# Altium PCB PCB1.PcbDoc (part 2 of 2)
Units mm, origin at the board's own origin, x right, y up, seen from the top; angles counter-clockwise.
Board outline 124.84 x 79.12 mm, 2 copper layers (Top Layer, Bottom Layer); 83 components, 68 nets, 287 pads, 46 vias.
Unrouted connection lines stored in the file: 3.
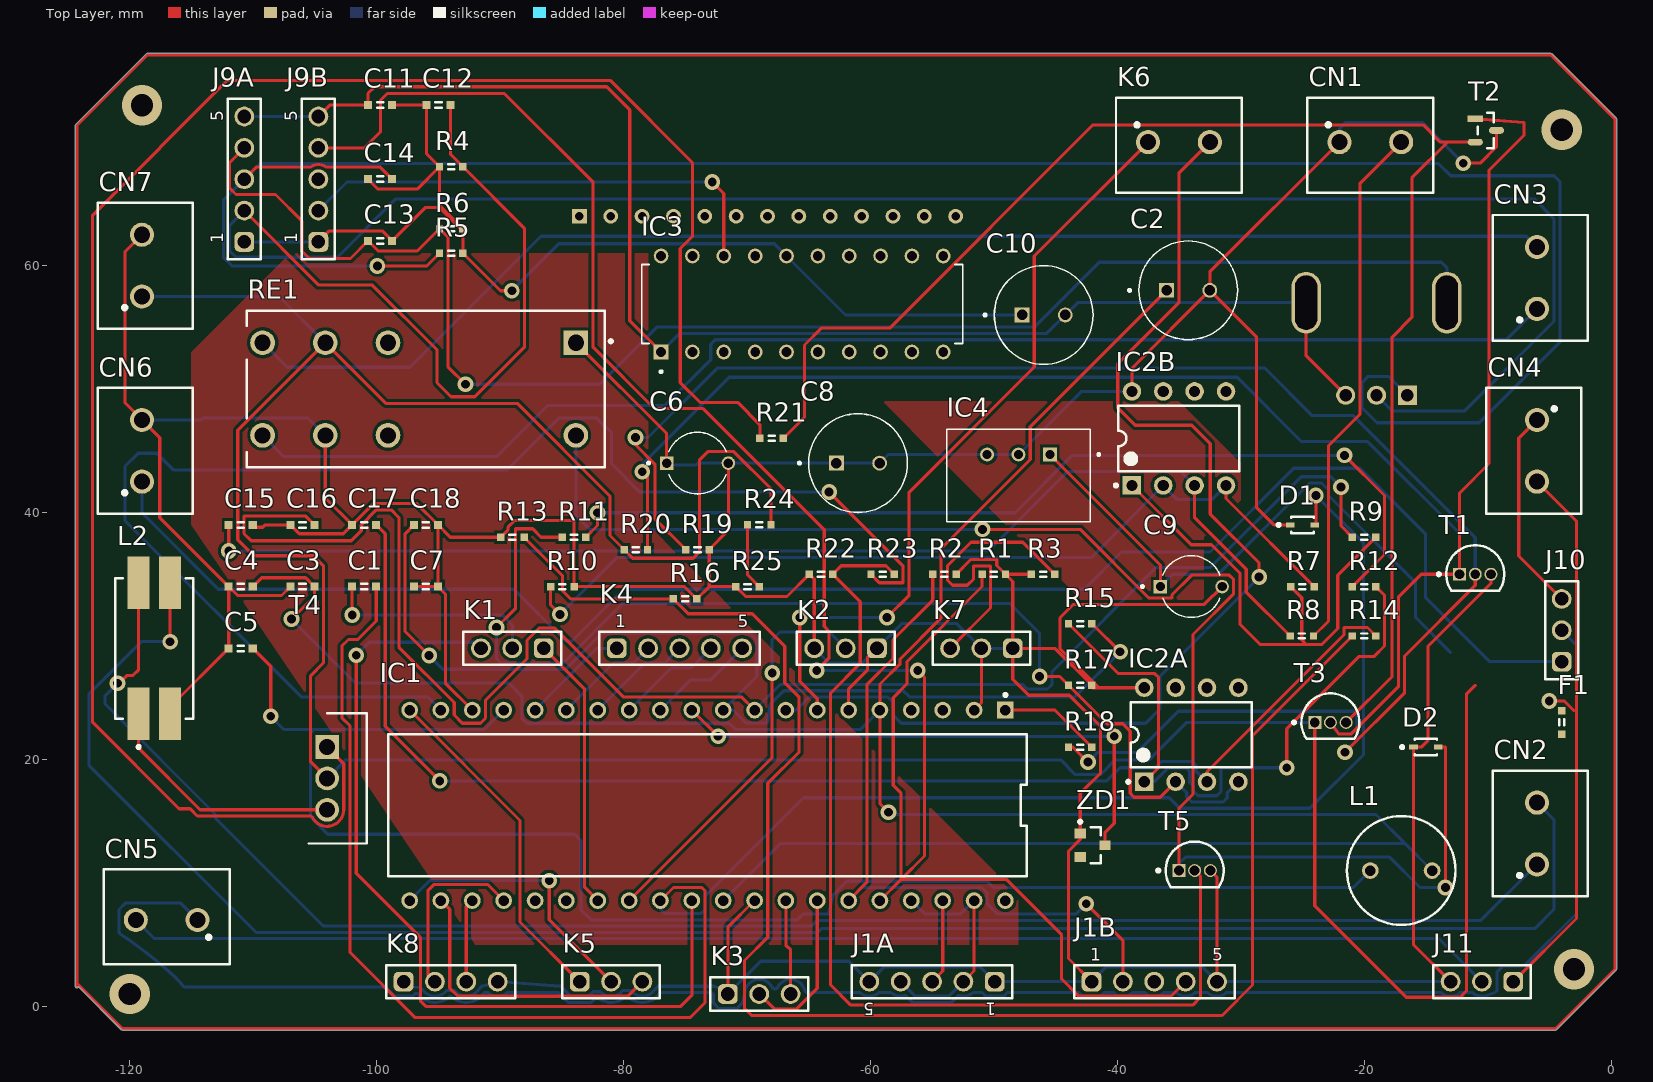
[diagram p0: Top Layer view]

## Via types
v1: diameter 1.27, hole 0.711, Top Layer to Bottom Layer, 42 vias
v2: diameter 3.27, hole 1.811, Top Layer to Bottom Layer, 4 vias

## Nets (pads, with @x,y where several pads share a name; then routed paths per layer and width w, separated by ;. In a path a pad name is that pad's centre, name@x,y a point inside that pad or via, vN(x,y) a via of type N, cw(c..) or ccw(c..) an arc to the next point about the centre after c; other vN are vias at no path point) (continued)
NetC14_1: (continued)
  Bottom Layer w0.254: v1(-99.932,59.969) -111.692,59.969 -112.403,60.68 -112.403,65.307 J9A.3 -109.435,68.275 -13.987,68.275 -12.988,67.275 -4.622,67.275 -4.123,66.776 -4.123,53.822 -10.676,47.269 -18.957,47.269 -20.176,48.488 -20.176,50.52 -19.668,51.028 -18.028,51.028 ENC1.A
NetC15_2: C15.2 IC2B.3 R8.1 | length 98.9
  Top Layer w0.254: v1(-111.975,36.88) C15.2 ; IC2B.3 -33.73,39.579 -29.553,35.402 -29.553,33.553 R8.1
  Bottom Layer w0.254: v1(-111.975,36.88) -50.458,36.88 -44.006,43.332 -34.872,43.332 IC2B.3
NetC16_1: C16.1 IC1.9 R9.1 | length 132.9
  Top Layer w0.254: C16.1 -105.731,39.706 -110.731,39.706 -110.731,38.294 -110.155,37.718 -102.04,37.718 -101.239,38.519 -101.239,38.983 -100.008,40.214 -98.811,40.214 -98.189,39.592 -98.189,29.092 -93.709,24.612 -93.709,23.596 -93.048,22.936 -91.575,22.936 -91.169,23.342 -91.169,24.79 -87.816,28.143 -87.816,29.641 -86.8,30.657 -85.606,30.657 -80.018,25.069 -70.449,25.069 IC1.9 ; v1(-21.878,42.062) -21.878,38.928 R9.1
  Bottom Layer w0.254: IC1.9 -67.308,26.072 -47.654,26.072 -47.286,25.704 -45.652,25.704 -45.271,26.085 -45.271,27.127 -36.838,35.559 -32.448,35.559 -25.108,42.9 -22.716,42.9 v1(-21.878,42.062)
NetC17_1: C17.1 IC2A.3 R14.1 | length 106.6
  Top Layer w0.254: C17.1 -99.297,38.272 -99.297,22.682 v1(-94.877,18.262) ; IC2A.3 -32.73,18.999 -21.631,30.098 -21.631,30.683 -19.733,30.683 R14.1
  Bottom Layer w0.254: v1(-94.877,18.262) -40.845,18.262 -39.778,19.329 -36.926,19.329 -36.425,19.829 -33.928,19.829 -33.631,19.532 -33.631,19.091 IC2A.3
NetC18_2: C18.2 IC1.10 R15.1 | length 86.2
  Top Layer w0.254: C18.2 -97.681,38.294 -97.681,30.362 v1(-95.741,28.422) ; R15.1 v1(-39.768,28.718)
  Bottom Layer w0.254: v1(-95.741,28.422) -94.623,27.304 -84.666,27.304 -81.771,30.2 -69.706,30.2 -69.198,29.692 -69.198,26.722 IC1.10 -71.092,24 -70.036,22.944 -68.351,22.944 -68.106,24.46 -67.001,25.564 -57.327,25.564 -56.832,25.069 -43.417,25.069 v1(-39.768,28.718)
NetCN1_2: CN1.2 R8.2 | length 42.9
  Top Layer w0.254: R8.2 -22.894,31.206 -22.894,45.415 -20.328,47.98 -20.328,66.672 CN1.2
NetCN2_1: CN2.1 L2.4 | length 137
  Top Layer w0.254: v1(-120.984,26.164) -120.837,26.164 -120.192,26.808 -119.72,26.808 -119.27,27.259 L2.4
  Bottom Layer w0.254: v1(-120.984,26.164) -121.984,25.164 -121.984,24.485 -113.043,15.544 -113.043,15.244 -104.296,6.497 -64.768,6.497 -64.306,6.959 -10.541,6.959 CN2.1
NetCN2_2: CN2.2 L2.3 | length 153.1
  Top Layer w0.254: L2.3 -116.73,29.548 v1(-116.721,29.54)
  Bottom Layer w0.254: v1(-116.721,29.54) -119.045,29.54 -123.3,25.285 -123.3,19.532 -109.757,5.989 -64.26,5.989 -63.951,6.299 -6.18,6.299 -4.631,7.848 -4.631,15.131 CN2.2
NetCN3_1: CN3.1 RE1.24 | length 109.6
  Bottom Layer w0.254: RE1.24 -107.506,44.526 -90.28,44.526 -86.14,48.666 -76.64,48.666 -72.932,52.374 -72.932,53.644 -72.576,54 -8.5,54 CN3.1
NetCN3_2: CN3.2 RE1.14 | length 108.8
  Bottom Layer w0.254: RE1.14 -107.245,51.765 -97.29,51.765 -86.673,62.382 -6.882,62.382 CN3.2
NetCN4_1: CN4.1 J10.3 | length 16.6
  Top Layer w0.254: CN4.1 -7.476,46.024 -7.476,36.476 J10.3
NetCN4_2: CN4.2 J11.1 | length 43.9
  Top Layer w0.254: J11.1 -2.802,7.118 -2.802,39.302 CN4.2
NetCN5_1: CN5.1 J10.2 | length 163.6
  Bottom Layer w0.254: CN5.1 -115.856,8.356 -120.353,8.356 -120.861,7.848 -120.861,6.063 -120.861,6.061 ccw(c-120.607,6.063) -120.748,5.852 cw(c-138.611,-21.405) -116.386,2.429 cw(c-120.932,-2.445) -115.675,1.652 -115.664,1.641 -115.59,1.567 -99.281,1.567 -99.207,1.492 -98.533,0.819 -97.086,0.819 -96.88,1.025 -96.67,1.025 -96.586,0.941 ccw(c-95.27,2) -94.165,0.722 cw(c-94,0.53) -93.835,0.722 ccw(c-92.73,2) -91.349,1.028 -91.334,1.042 -91.26,1.117 -90.974,1.117 ccw(c-90.19,2) -89.406,1.117 -85.28,1.117 -84.474,0.311 -82.606,0.311 -82.24,0.677 -82.135,0.677 -82.05,0.677 ccw(c-81,2) -79.895,0.722 cw(c-79.73,0.53) -79.565,0.722 ccw(c-78.46,2) -77.079,1.028 -77.064,1.042 -76.99,1.117 -72.87,1.117 -72.721,0.968 -72.721,0.277 -72.263,-0.181 -70.816,-0.181 -70.359,0.277 -70.156,1.243 cw(c-69,1) -70.14,1.307 -70.104,1.442 -70.037,1.564 cw(c-69,1) -67.954,1.549 ccw(c-67.73,1.668) -67.506,1.549 cw(c-66.46,1) -65.304,1.242 -65.253,1.191 -65.179,1.117 -60.864,1.117 ccw(c-60.08,2) -59.296,1.117 -58.324,1.117 ccw(c-57.54,2) -57.249,0.855 -57.219,0.855 -57.114,0.855 -56.563,0.304 -53.437,0.304 -52.886,0.855 -52.781,0.855 -52.751,0.855 ccw(c-52.46,2) -51.676,1.117 -50.942,1.117 -50.644,0.819 -49.197,0.819 -48.899,1.117 -43.101,1.117 -42.804,0.819 -41.356,0.819 -41.059,1.117 -40.324,1.117 ccw(c-39.54,2) -38.756,1.117 -37.784,1.117 ccw(c-37,2) -36.216,1.117 -35.244,1.117 ccw(c-34.46,2) -33.676,1.117 -32.704,1.117 ccw(c-31.92,2) -31.136,1.117 -13.784,1.117 ccw(c-13,2) -12.216,1.117 -11.244,1.117 ccw(c-10.46,2) -10.073,0.884 -9.403,1.117 -9.254,1.266 -9.254,2.768 -8.746,3.276 -7.044,3.276 -2.802,7.518 -2.802,29.262 J10.2
NetCN5_2: CN5.2 J11.2 | length 111.1
  Bottom Layer w0.254: CN5.2 -117.981,5.481 -13.941,5.481 J11.2
NetCN6_1: CN6.1 J10.1 | length 137.1
  Bottom Layer w0.254: CN6.1 -119,39.972 -112.81,33.781 -88.883,33.781 -84.694,29.593 -84.159,29.593 -79.97,33.781 -42.68,33.781 -39.658,36.804 -32.484,36.804 -25.702,43.586 -20.354,43.586 -15.045,38.277 -15.045,33.135 -9.83,27.92 J10.1
NetCN7_1: CN7.1 F1.1 R20.2 R24.1 RE1.11 T3.1 T4.2 | length 257
  Top Layer w0.254: T4.2 -105.342,19.802 -105.342,26.771 -104.301,27.812 -104.301,35.686 -105.113,36.499 -109.952,36.499 -111.239,37.786 -111.239,46.661 RE1.11 -99.244,48.844 -88.603,48.844 -81.085,41.325 -81.085,38.135 R20.2 -79.246,36.296 -74.354,36.296 -73.846,36.804 -73.846,44.245 -73.16,44.931 -71.052,44.931 -68.05,41.929 R24.1 ; T3.1 -24,8.142 -16.594,0.736 -12.226,0.736 -11.718,1.244 -11.718,25.282 -11,26
  Bottom Layer w0.254: CN7.1 -107.9,57.5 RE1.11 ; T4.2 -102.496,19.964 -44.585,19.964 -43.391,18.77 -41.353,18.77 -40.159,19.964 -37.417,19.964 -34.381,23 T3.1
NetD2_2: D2.2 RE1.A2 T5.1 | length 124.4
  Top Layer w0.254: v1(-50.91,38.633) -42.995,38.633 -37.431,33.069 -35.568,33.069 -35.568,33.331 -33.968,34.931 -30.92,34.931 -30.569,34.58 -30.569,33.421 -33.866,30.124 -33.866,17.186 -35,16.052 T5.1 ; D2.2 -13.419,21 v1(-13.419,9.626)
  Bottom Layer w0.254: RE1.A2 -83.854,46.25 -83.854,39.75 -82.736,38.633 v1(-50.91,38.633) ; T5.1 -35,11.566 -34.476,12.09 -17.941,12.09 -15.477,9.626 v1(-13.419,9.626)
NetIC1_1: IC1.1 R18.1 | length 8.3
  Top Layer w0.254: IC1.1 -45.05,24 R18.1
NetIC1_7: IC1.7 K6.1 | length 62.4
  Top Layer w0.254: v1(-65.721,31.495) -65.721,26.337 -64.3,24.916 IC1.7 ; v1(-58.657,31.495) -56.861,33.291 -56.861,41.648 -46.719,51.79 -46.719,60.781 K6.1
  Bottom Layer w0.254: v1(-65.721,31.495) v1(-58.657,31.495)
NetIC1_8: IC1.8 K6.2 | length 92.4
  Top Layer w0.254: K6.2 -35.009,67.491 -35.009,56.997 -39.962,52.044 -39.962,48.488 -38.54,47.066 -33.968,47.066 -32.469,45.567 -32.469,39.872 -28.507,35.91 v1(-28.507,34.772)
  Bottom Layer w0.254: IC1.8 -66.012,24 -64.956,25.056 -58.593,25.056 -58.149,24.612 -58.149,23.596 -57.488,22.936 -37.702,22.936 -36.533,24.104 -36.533,26.746 v1(-28.507,34.772)
NetIC1_11: IC1.11 ZD1.3 | length 44.2
  Top Layer w0.254: IC1.11 v1(-72.329,21.869) ; ZD1.3 -41,14.071 -40.242,14.829 v1(-40.242,21.869)
  Bottom Layer w0.254: v1(-72.329,21.869) v1(-40.242,21.869)
NetIC1_12: IC1.12 K4.5 | length 8.7
  Bottom Layer w0.254: IC1.12 -74.559,26.441 -72.939,26.441 K4.5
NetIC1_13: IC1.13 K4.4 | length 8.7
  Bottom Layer w0.254: IC1.13 -76.134,27.406 -74.514,27.406 K4.4
NetIC1_14: IC1.14 K4.3 | length 8.7
  Bottom Layer w0.254: IC1.14 -78.268,27.812 -76.648,27.812 K4.3
NetIC1_15: IC1.15 K4.2 | length 8.7
  Bottom Layer w0.254: IC1.15 -80.808,27.812 -79.188,27.812 K4.2
NetIC1_16: IC1.16 K4.1 | length 8.7
  Bottom Layer w0.254: IC1.16 -82.16,29 K4.1
NetIC1_19: IC1.19 R23.2 | length 112.8
  Top Layer w0.254: v1(-63.338,41.655) -57.369,35.686 -57.369,34.315 -59.265,34.315 R23.2
  Bottom Layer w0.254: IC1.19 -95.849,25.069 -106.104,25.069 -120.379,39.344 -120.379,43.738 -119.312,44.805 -117.788,44.805 -116.416,43.433 -89.442,43.433 -85.225,47.65 -82.152,47.65 -80.958,46.456 -80.958,43.941 -78.672,41.655 v1(-63.338,41.655)
NetIC1_20: IC1.20 K5.1 | length 27.7
  Top Layer w0.254: IC1.20 -88.375,15.055 -88.375,6.835 K5.1
NetIC1_21: IC1.21 K5.2 | length 22.2
  Top Layer w0.254: v1(-86.013,10.185) -86.013,7.013 K5.2
  Bottom Layer w0.254: IC1.21 -95.705,10.185 v1(-86.013,10.185)
NetIC1_22: IC1.22 K5.3 | length 23.8
  Top Layer w0.254: IC1.22 -94.064,7.854 -94.064,1.473 -93.404,0.812 -79.648,0.812 K5.3
NetIC1_23: IC1.23 K8.3 | length 6.8
  Top Layer w0.254: K8.3 -92.73,8.08 IC1.23
NetIC1_24: IC1.24 K8.2 | length 14.5
  Top Layer w0.254: K8.2 -95.842,2.572 -95.842,9.372 -95.334,9.88 -91.011,9.88 IC1.24
NetIC1_27: IC1.27 K1.1 | length 22.2
  Top Layer w0.254: K1.1 -83.142,25.682 -83.142,9.632 IC1.27
NetIC1_28: IC1.28 K2.2 | length 32.7
  Top Layer w0.254: IC1.28 -67.953,20.156 v1(-67.953,27)
  Bottom Layer w0.254: v1(-67.953,27) -67.953,29.692 -67.318,30.327 -63.327,30.327 K2.2
NetIC1_30: IC1.30 K1.3 | length 71.1
  Top Layer w0.254: v1(-101.643,28.438) -101.643,10.778 -96.452,5.587 -96.452,0.452 -96,0 -75.344,0 -74.46,0.884 IC1.30
  Bottom Layer w0.254: v1(-101.643,28.438) -100.592,29.489 -92.029,29.489 K1.3
NetIC1_33: IC1.33 K3.3 | length 7.7
  Top Layer w0.254: IC1.33 -66.84,4.951 -66.46,4.571 K3.3
NetIC1_34: IC1.34 K3.2 | length 13
  Top Layer w0.254: K3.2 -67.796,-0.204 -65.972,-0.204 -64.3,1.468 IC1.34
NetIC1_35: IC1.35 J1B.2 R2.1 | length 58.2
  Top Layer w0.254: IC1.35 -60.282,10.047 -60.282,26.06 -58.164,28.179 -58.164,29.684 -54.95,32.898 R2.1 ; v1(-42.502,8.305) -39.54,5.343 J1B.2
  Bottom Layer w0.254: IC1.35 -60.704,9.626 -50.986,9.626 -50.544,9.184 -50.544,8.32 -49.716,7.492 -43.315,7.492 v1(-42.502,8.305)
NetIC1_36: IC1.36 J1B.4 J9B.4 R1.1 | length 167.2
  Top Layer w0.254: J9B.4 -100.978,69.54 -99.678,70.84 -99.678,73.38 -99.119,73.939 -89.645,73.939 -82.457,66.751 -82.457,53.39 -77.478,48.412 -73.541,48.412 -63.737,38.607 -63.737,30.784 -63.356,30.403 -63.356,28.193 v1(-64.346,27.203) ; -57.503,10.286 IC1.36 -57.503,10.286 ; v1(-56.168,27.203) -55.609,26.644 -55.609,12.181 -57.503,10.287 ; R1.1 -50.95,34.005 -57.034,27.921 -57.034,26.116 -58.149,25.001 -58.149,17.9 -57.503,17.254 -57.503,10.287 ; J1B.4 -35.648,0.812 -43.112,0.812 -44.509,2.209 -44.509,5.791 -49.005,10.286 -57.503,10.286
  Bottom Layer w0.254: v1(-64.346,27.203) v1(-56.168,27.203)
NetIC1_37: IC1.37 IC1.39 J1A.2 J1A.4 | length 19
  Top Layer w0.254: J1A.2 -51.6,2.86 IC1.39
  Bottom Layer w0.254: J1A.4 -56.352,0.812 -53.648,0.812 J1A.2 ; IC1.37 -55.603,7.492 -52.677,7.492 IC1.39
NetIC1_38: IC1.38 J1A.3 | length 6.9
  Top Layer w0.254: J1A.3 -54.14,2.86 IC1.38
NetIC1_40: IC1.40
NetIC2A_1: IC2A.1 R12.1 R15.2 | length 52.7
  Top Layer w0.254: R15.2 -39.899,26.949 -36.965,26.949 -36.66,26.644 -36.66,19.34 IC2A.1 ; v1(-26.272,19.329) -26.272,22.478 -20.404,28.346 -19.185,28.346 -18.347,29.184 -18.347,33.297 R12.1
  Bottom Layer w0.254: IC2A.1 -37.012,18.19 -35.881,19.321 -34.436,19.321 -34.139,19.024 -34.139,18.154 -33.841,17.856 -33.841,17.44 -33.46,17.059 -31.936,17.059 -31.599,17.396 -31.599,19.227 -31.497,19.329 v1(-26.272,19.329)
NetIC2A_2: IC2A.2 IC2A.4 R11.2 R17.2 | length 91.3
  Top Layer w0.254: v1(-90.28,30.683) -88.756,32.207 -88.756,38.681 -87.359,38.681 -86.678,38 R11.2 ; v1(-46.287,26.72) -44.67,26.72 R17.2 -40.835,22.885 -39.556,22.885 -38.946,22.275 -38.946,17.246 -38.642,16.941 -36.519,16.941 IC2A.2
  Bottom Layer w0.254: v1(-90.28,30.683) -90.28,28.168 -89.924,27.812 -84.877,27.812 -80.051,32.638 -48.725,32.638 -46.287,30.2 v1(-46.287,26.72) ; IC2A.2 -34.369,17.289 -34.369,16.952 -33.968,16.551 -31.428,16.551 -31.091,16.888 -31.091,17.289 IC2A.4
NetIC2B_1: IC2B.1 R7.1 R9.2 | length 38.9
  Top Layer w0.254: IC2B.1 -34.008,37.388 -32.361,37.388 -30.061,35.088 -30.061,30.941 -28.431,29.311 -24.672,29.311 ; R7.1 -25.053,33.103 -25.053,29.692 -24.672,29.311 ; R9.2 -22.139,34.911 -22.139,30.611 -23.439,29.311 -24.672,29.311
NetIC2B_2: IC2B.2 IC2B.4 R7.2 R10.2 | length 72.9
  Top Layer w0.254: R10.2 -85.9,32.511 v1(-85.138,31.749) ; IC2B.4 -31.19,41.14 R7.2
  Bottom Layer w0.254: v1(-85.138,31.749) -80.541,36.347 -42.113,36.347 IC2B.2 -35.126,41.046 -32.334,41.046 IC2B.4
NetIC3_17: IC3.17
NetIC3_18: IC3.18 J9B.2 | length 39.2
  Top Layer w0.254: v1(-72.805,66.776) -71.87,65.841 IC3.18
  Bottom Layer w0.254: J9B.2 -102.394,66.776 v1(-72.805,66.776)
NetK7_3: K7.3 R3.2 | length 24.7
  Top Layer w0.254: K7.3 -50.269,32.271 -50.269,35.681 -51.631,35.681 -51.631,34.62 -52.139,34.112 -53.348,34.112 -53.755,34.518 -53.755,35.686 -51.845,37.596 -47.646,37.596 R3.2
NetL2_1: L2.1 T4.3 | length 20.1
  Top Layer w0.254: L2.1 -119.27,20.891 -114.299,15.92 T4.3
NetR11_1: R11.1 R12.2 | length 77.9
  Top Layer w0.254: R11.1 -82.101,38.949 v1(-82.101,39.979) ; v1(-21.598,44.627) -18.347,41.376 -18.347,36.603 R12.2
  Bottom Layer w0.254: v1(-82.101,39.979) -48.284,39.979 -43.636,44.627 v1(-21.598,44.627)
NetR13_1: R13.1 R14.2 R16.2 | length 131.1
  Top Layer w0.254: R13.1 -84.946,34.896 -84.946,33.686 -84.26,33 R16.2 -74.75,31.8 -69.579,31.8 -66.937,29.159 -66.937,26.212 -65.769,25.044 -65.769,20.599 -68.309,18.059 -68.309,5.587 -70.188,3.708 -70.188,-0.153 -69.604,-0.737 -31.504,-0.737 -29.04,1.727 -29.04,21.91 R14.2
NetR18_2: R18.2 R19.2 T1.2 | length 137.8
  Top Layer w0.254: v1(-79.028,46.075) -79.028,45.491 -77.453,43.916 -77.453,39.503 R19.2 ; R18.2 -43.589,21 v1(-42.375,19.786) ; v1(-21.547,20.573) -16.721,25.399 -16.721,28.378 -11,34.099 T1.2
  Bottom Layer w0.254: v1(-79.028,46.075) -78.012,46.075 -72.373,51.714 -28.075,51.714 -24.214,47.853 -20.887,47.853 -11,37.966 T1.2 ; v1(-42.375,19.786) -41.588,20.573 -38.388,20.573 -35.055,23.906 -20.864,23.906 -20.554,23.596 -20.554,21.567 v1(-21.547,20.573)
NetR20_1: R20.1 T1.1 T2.1 T3.2 | length 148
  Top Layer w0.254: v1(-78.469,43.306) -78.05,42.888 R20.1 ; T3.2 -22.055,22.072 -21.039,22.072 -17.229,25.882 -17.229,33.146 -15.376,35 T1.1 -12.27,41.586 -9.889,43.967 -9.889,67.734 -7.044,70.579 -7.044,71.595 T2.1
  Bottom Layer w0.254: v1(-78.469,43.306) -78.469,43.916 -71.433,50.952 -30.285,50.952 -25.078,45.745 -19.719,45.745 -12.27,38.296 T1.1
NetR21_1: R21.1 T2.2 T3.3 | length 121
  Top Layer w0.254: R21.1 -65.337,47.713 -65.337,53.568 -63.965,54.94 -58.428,54.94 -41.969,71.399 -15.225,71.399 -13.826,70 -13.243,70 ; T3.3 -17.737,26.723 -17.737,54.203 -16.137,55.803 -16.137,67.106 -13.243,70 ; T2.2 -13.243,70
NetR21_2: R21.2 T4.1 | length 154.4
  Top Layer w0.254: T4.1 -102.659,19.659 -102.659,16.035 -102.659,15.923 cw(c-104,15.92) -105.194,15.31 -105.222,15.338 -105.296,15.412 -114.51,15.412 -115.098,16 -116,16 -123,23 -123,64.079 -112.079,75 -81.079,75 -74.405,68.325 -74.405,62.382 -75.395,61.391 -75.395,50.52 -73.795,48.92 -70.747,48.92 -68.95,47.123 R21.2
NetR22_1: R22.1 R23.1 T5.2 | length 82.1
  Top Layer w0.254: R23.1 -58.736,35.686 -62.364,35.686 R22.1 -60.816,32.766 -60.816,27.787 -63.229,25.374 -63.229,1.752 -61.578,0.101 -33.892,0.101 -33.257,0.736 -33.257,10.527 T5.2
NetR24_2: R24.2 R25.1 | length 5.4
  Top Layer w0.254: R24.2 -69.95,34.95 R25.1
pads on no net: IC1.3 IC1.4 IC1.25 IC1.26 IC2.1 IC2.2 IC2.3 IC2.4 IC2.5 IC2.6 IC2.7 IC2.8 IC2.9 IC2.10 IC2.11 IC2.12 IC2.13 IC2A.5 IC2A.6 IC2A.7 IC2B.5 IC2B.6 IC2B.7 IC3.2 IC3.3 IC3.4 IC3.5 IC3.6 IC3.7 IC3.8 IC3.9 IC3.10 IC3.11 IC3.12 IC3.13 IC3.14 IC3.15 IC3.19 IC3.20 J1B.3 J9B.3 RE1.12 RE1.22 ZD1.2
copper on no net: | length 396
  Top Layer w0.254: -124.265,1.625 -124.265,2.133 ; -124.265,2.133 -124.265,1.879 -120.582,-1.804 -4.504,-1.804 0.322,3.022 0.322,71.856 -4.885,77.063 -118.55,77.063 -124.265,71.348 -124.265,2.133
  other v2: -120,1 -3,3 -4,71 -119,73

## Polygon pours and split planes (outlines as drawn)
no net on Top Layer "NONET_L01_P001" (solid, pour order 1): -30,44 -35,49 -59,49 -42,32 -33,32 -33,38 -30,41
no net on Top Layer "NONET_L01_P000" (solid, pour order 0): -115,39 -115,53 -107,61 -78,61 -78,39 -48,9 -48,5 -92,5

## Text inside footprints (layer, text, board x,y; h text height)
J1A: Top Overlay "5" at -59.7,0.3 h1.02 r180; Top Overlay "1" at -49.8,0.3 h1.02 r180
J1B: Top Overlay "5" at -32.3,3.7 h1.02; Top Overlay "1" at -42.2,3.7 h1.02
J9A: Top Overlay "5" at -112.41,71.7 h1.02 r90; Top Overlay "1" at -112.41,61.8 h1.02 r90
J9B: Top Overlay "5" at -106.41,71.7 h1.02 r90; Top Overlay "1" at -106.41,61.8 h1.02 r90
K4: Top Overlay "5" at -70.76,30.7 h1.02; Top Overlay "1" at -80.66,30.7 h1.02